# EAGLE board ArduinoTemplateShield (EAGLE 9.3.0)
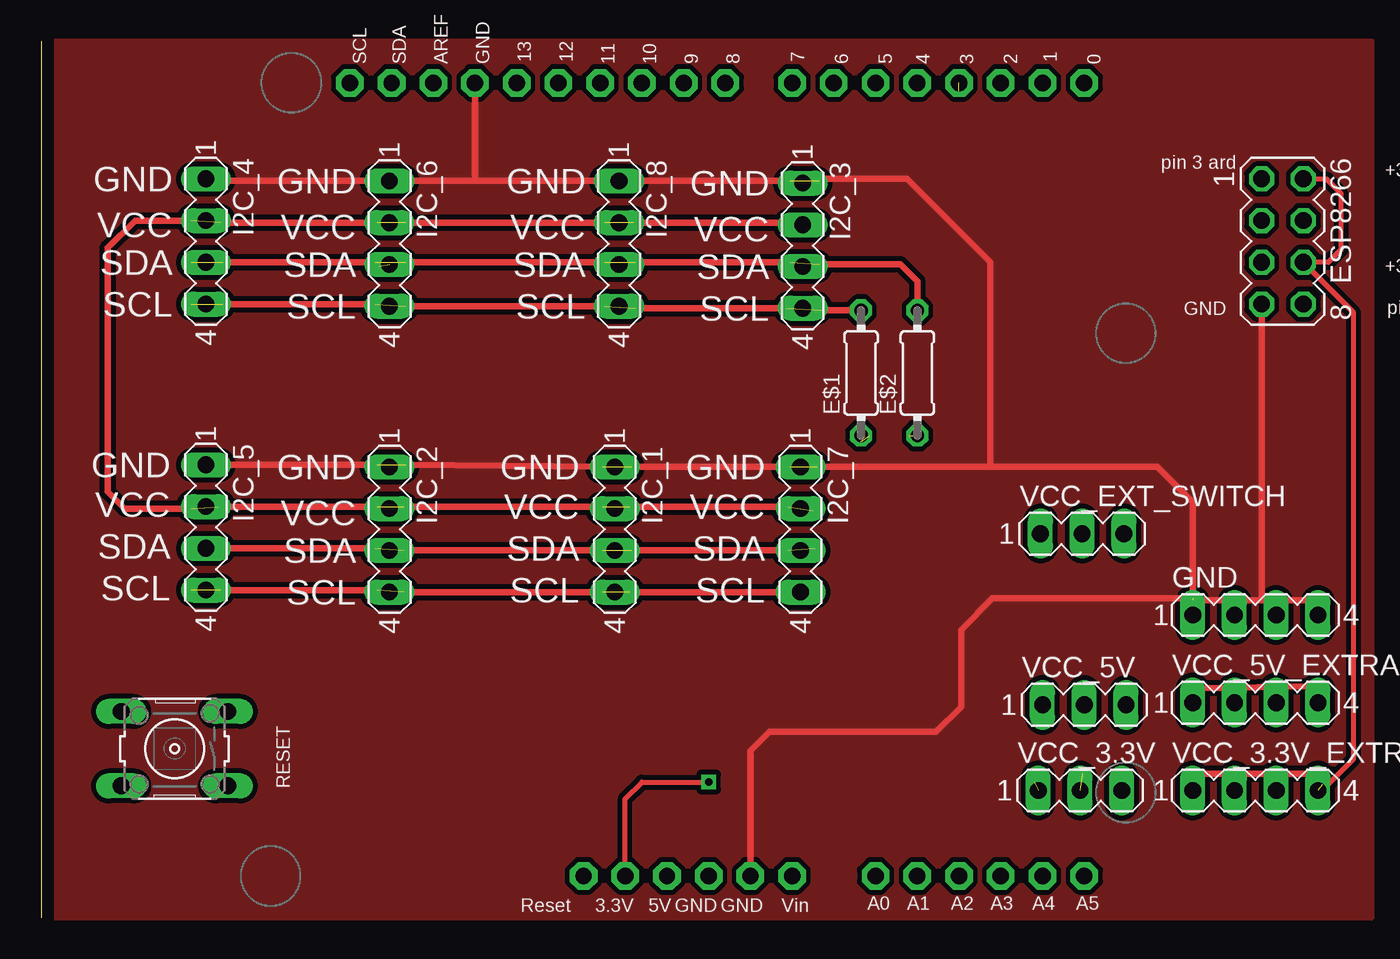
[diagram p0: board, top side]
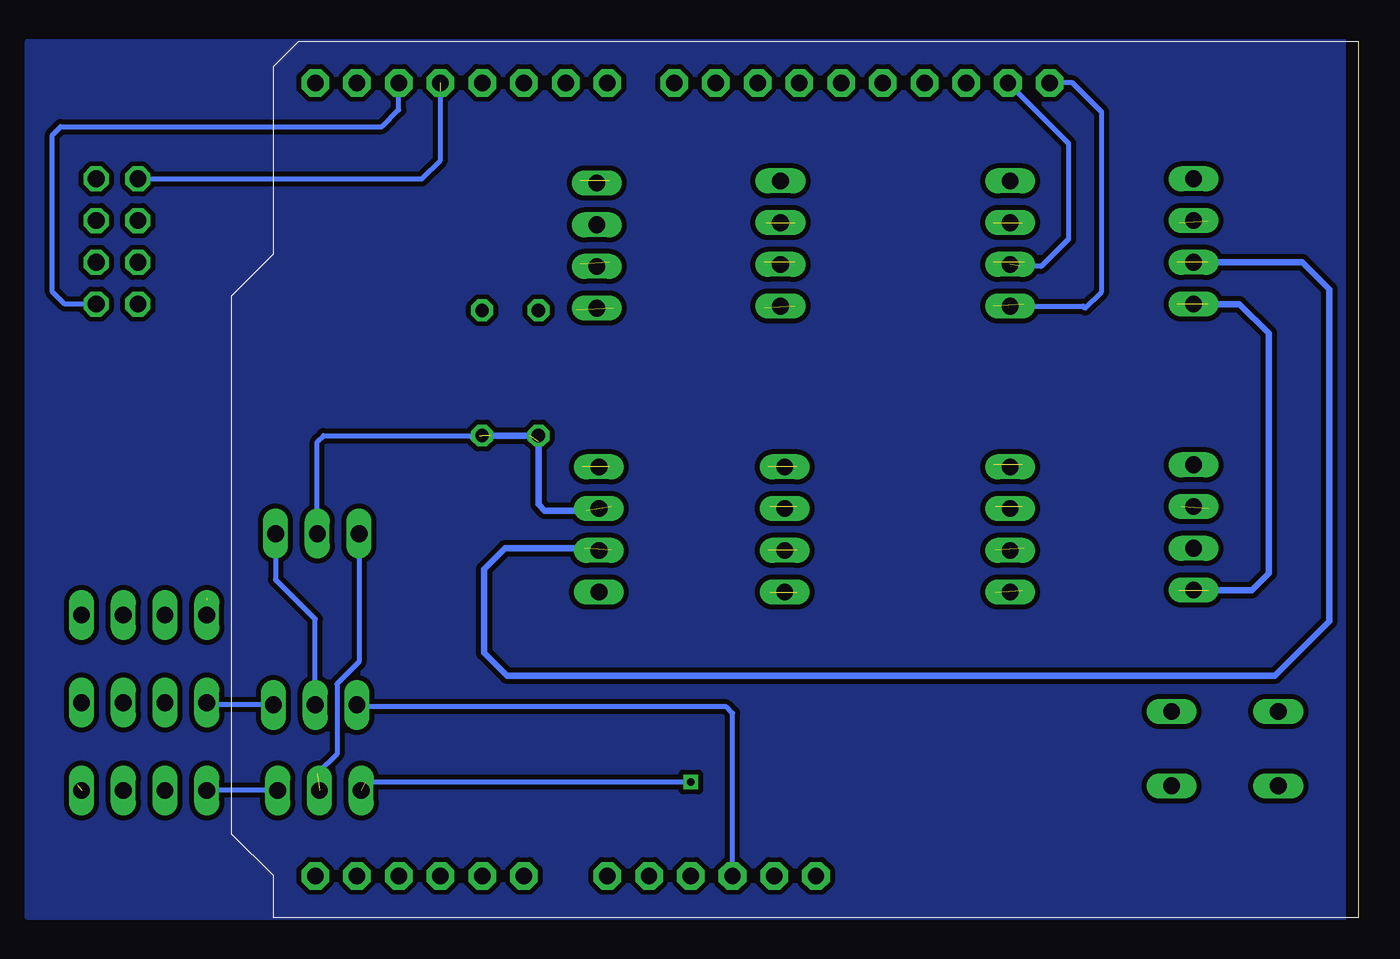
[diagram p1: board, bottom side, seen from below]

Size 0 x 53.34 mm. Coordinates in mm from the lower left corner, seen from the top.
Outline: 0,53.34 0,0
Copper layers (1*16): Top 0.035mm / dielectric 1.5mm / Bottom 0.035mm
Design rules "default *": minimum track width 12mil, minimum drill 19mil, track to track 12mil, track to pad 12mil, pad to pad 12mil, via to via 12mil, smd to smd 8mil, copper to edge 30mil, drill to drill 8mil, minimum pad ring 10mil, minimum via ring 8mil, stop-mask expansion 4mil, vias tented up to drill 0mil, thermal gap 10mil

## Footprints (pad centres in the part's own frame; a part is rotated, then mirrored left to right if it is on the bottom)
0204/7 = drill 0.813 octagon: 1 -3.81,0; 2 3.81,0
MA04-2 = drill 1.016 octagon: 1 -3.81,-1.27; 2 -3.81,1.27; 3 -1.27,-1.27; 4 -1.27,1.27; 5 1.27,-1.27; 6 1.27,1.27; 7 3.81,-1.27; 8 3.81,1.27
MA04-1 = drill 1.016 long: 1 -3.81,0; 2 -1.27,0; 3 1.27,0; 4 3.81,0
B3F-10XX = drill 1.016 long: 1 -3.251,2.261; 2 3.251,2.261; 3 -3.251,-2.261; 4 3.251,-2.261
ARDUINOR3-NOTEXT-NOIOREF = drill 1 pad 1.676 octagon: 3V 35.56,2.54; 5V 38.1,2.54; A0 50.8,2.54; A1 53.34,2.54; A2 55.88,2.54; A3 58.42,2.54; A4 60.96,2.54; A5 63.5,2.54; AREF 23.876,50.8; D0 63.5,50.8; D1 60.96,50.8; D2 58.42,50.8; D3 55.88,50.8; D4 53.34,50.8; D5 50.8,50.8; D6 48.26,50.8; D7 45.72,50.8; D8 41.656,50.8; D9 39.116,50.8; D10 36.576,50.8; D11 34.036,50.8; D12 31.496,50.8; D13 28.956,50.8; GND 26.416,50.8; GND1 43.18,2.54; GND2 40.64,2.54; RESET 33.02,2.54; SCL 18.796,50.8; SDA 21.336,50.8; VIN 45.72,2.54
MA03-1 = drill 1.016 long: 1 -2.54,0; 2 0,0; 3 2.54,0

## Placement (x,y rotation side)
E$1  [0204/7]  49.91,33.15 90 top  (outside the outline)
E$2  [0204/7]  53.34,33.15 90 top  (outside the outline)
ESP8266  [MA04-2]  75.56,41.15 270 top  (outside the outline)
GND  [MA04-1]  73.91,18.41 0 top  (outside the outline)
I2C_1  [MA04-1]  34.92,23.62 270 top  (outside the outline)
I2C_2  [MA04-1]  21.21,23.62 270 top  (outside the outline)
I2C_3  [MA04-1]  46.35,40.89 270 top  (outside the outline)
I2C_4  [MA04-1]  10.03,41.15 270 top  (outside the outline)
I2C_5  [MA04-1]  10.03,23.75 270 top  (outside the outline)
I2C_6  [MA04-1]  21.21,41.02 270 top  (outside the outline)
I2C_7  [MA04-1]  46.23,23.62 270 top  (outside the outline)
I2C_8  [MA04-1]  35.18,41.02 270 top  (outside the outline)
RESET  [B3F-10XX]  8.13,10.29 180 top  (outside the outline)
U1  ARDUINOR3-NOIOREF-NOTEXT  [ARDUINOR3-NOTEXT-NOIOREF]  0,0 0 top  (outside the outline)
VCC_3.3V  [MA03-1]  63.25,7.75 0 top  (outside the outline)
VCC_3.3V_EXTRA  [MA04-1]  73.91,7.75 0 top  (outside the outline)
VCC_5V  [MA03-1]  63.5,12.95 0 top  (outside the outline)
VCC_5V_EXTRA  [MA04-1]  73.91,13.08 0 top  (outside the outline)
VCC_EXT_SWITCH  [MA03-1]  63.37,23.37 0 top  (outside the outline)

## Library data of the parts
E$1 E$2 = eagle-ltspice
ESP8266 GND I2C_1-I2C_8 VCC_3.3V VCC_3.3V_EXTRA VCC_5V VCC_5V_EXTRA VCC_EXT_SWITCH = con-lstb
RESET = switch-omron
U1 = adafruit

## Nets
S$1: VCC_5V.3 VCC_5V_EXTRA.1
S$2: VCC_3.3V.3 VCC_3.3V_EXTRA.1
S$3: ESP8266.2 ESP8266.6 VCC_3.3V_EXTRA.4
S$5: U1.5V VCC_5V.1
S$6: I2C_6.4 U1.SCL
S$7: I2C_6.3 U1.SDA
S$8: ESP8266.1 U1.D3
S$12: VCC_5V.2 VCC_EXT_SWITCH.3
S$13: U1.3V VCC_3.3V.1
S$14: VCC_3.3V.2 VCC_EXT_SWITCH.1
S$15: ESP8266.8 U1.D2
VCC_EXT: E$2.1 VCC_EXT_SWITCH.2
VIN: U1.VIN

## Tracks (layer width: path | path; a pad name or v marks a point on that pad's centre or on a via)
GND  (5 unrouted)
  Top 0.406: 47.37,44.83 47.5,44.96 52.7,44.96 57.78,39.88 57.78,27.43 | 47.24,27.43 57.78,27.43 | 57.78,27.43 67.94,27.43 70.1,25.27 70.1,19.43 57.91,19.43 56.01,17.53 56.01,12.83 54.48,11.3 44.32,11.3 43.18,10.16 43.18,3.3 | 35.94,27.43 45.59,27.43 | 22.23,27.56 34.16,27.43 | 36.2,44.83 45.59,44.83 | 22.23,44.83 26.42,44.83 | 26.42,44.83 34.29,44.83 | 26.42,50.04 26.42,44.83 | 10.92,44.83 13.84,44.83 20.19,44.83 | 70.1,19.3 74.3,19.3 | 74.3,19.3 77.98,19.3 | 74.3,36.7 74.3,19.3 | 11.05,27.56 20.45,27.56
  pour Bottom: 0,53.34 0,0 81.03,0 81.03,53.34
  pour Top: 0,53.34 0,0 81.03,0 81.03,53.34
S$1
  Bottom 0.305: VCC_5V.3 69.98,12.95 VCC_5V_EXTRA.1
S$2
  Bottom 0.305: VCC_3.3V.3 VCC_3.3V_EXTRA.1
S$3  (1 unrouted)
  Top 0.305: ESP8266.6 76.96,39.75 | 76.96,39.75 79.88,36.83 79.88,9.65 78.33,8.1 77.98,8.1 | ESP8266.2 78.23,44.96 79.12,44.07 79.12,40.64 78.36,39.88 77.09,39.88 76.96,39.75
S$5
  Bottom 0.305: U1.5V 38.1,12.45 38.48,12.83 60.83,12.83 VCC_5V.1
S$6
  Bottom 0.305: I2C_6.4 16.76,37.21 16.64,37.08 15.62,38.1 15.62,49.02 17.4,50.8 U1.SCL
S$7  (1 unrouted)
  Bottom 0.305: U1.SDA 17.65,47.12 17.65,41.27 19.3,39.62 20.57,39.62
S$8  (1 unrouted)
  Bottom 0.305: ESP8266.1 57.02,44.96 55.88,46.1 55.88,50.29
S$12
  Bottom 0.305: VCC_EXT_SWITCH.3 65.91,20.57 63.5,18.16 VCC_5V.2
S$13  (via drill 0.48)  (1 unrouted)
  Top 0.305: U1.3V 35.56,7.24 36.58,8.26 v40.64,8.26
  Bottom 0.305: v40.64,8.26 60.45,8.26 60.71,8.51
S$14  (1 unrouted)
  Bottom 0.305: VCC_EXT_SWITCH.1 60.83,15.57 62.18,14.22 62.18,9.96 63.37,8.76
S$15
  Bottom 0.305: ESP8266.8 78.74,37.34 79.5,38.1 79.5,47.62 78.99,48.13 59.44,48.13 58.42,49.15 U1.D2
SCL  (7 unrouted)
  Top 0.406: 10.92,19.94 20.45,19.94 | 11.05,37.34 20.32,37.34 | 22.23,37.21 34.29,37.21 | 36.2,37.08 45.34,37.08 | 47.62,36.96 49.28,36.96 | 22.1,19.81 34.16,19.81 | 35.81,19.81 45.34,19.81
  Bottom 0.406: 9.14,19.94 6.48,19.94 5.46,20.95 5.46,35.56 7.24,37.34 9.14,37.34
SDA  (7 unrouted)
  Top 0.406: 11.05,39.88 20.32,39.88 | 36.2,39.88 45.59,39.88 | 22.23,39.88 34.29,39.88 | 47.37,39.75 52.32,39.75 53.34,38.73 53.34,37.59 | 35.94,22.35 45.47,22.35 | 22.1,22.35 34.16,22.35 | 10.92,22.48 20.32,22.48
  Bottom 0.406: 47.12,22.48 51.94,22.48 53.21,21.21 53.21,16.13 51.82,14.73 5.08,14.73 1.78,18.03 1.78,38.23 3.43,39.88 9.14,39.88
VCC_3.3
  Top 0.406: 70.23,8.76 77.98,8.76
VCC_5
  Top 0.406: 70.1,13.97 77.85,14.1
VCC_EXT  (10 unrouted)
  Top 0.406: 35.81,25.02 45.47,25.02 | 22.1,25.02 34.16,25.02 | 10.79,25.02 20.45,25.02 | 9.14,24.89 5.08,24.89 4.06,25.91 4.06,40.77 5.71,42.42 9.14,42.42 | 10.92,42.29 20.45,42.29 | 22.23,42.29 34.29,42.29 | 36.07,42.29 45.59,42.29
  Bottom 0.305: VCC_EXT_SWITCH.2 63.37,28.96 62.99,29.34 53.85,29.34 | 53.49,29.34 53.85,29.34 | 53.85,29.34 53.98,29.21
  Bottom 0.406: 50.42,29.34 52.83,29.34 | 49.91,28.96 49.91,25.65 49.91,25.15 49.53,24.77 46.99,24.77

## Text on the board
tPlace: SCL | SDA | AREF | GND | 13 | 12 | 11 | 10 | 9 | 8 | 7 | 6 | 5 | 4 | 3 | 2 | 1 | 0 | GND | GND | GND | pin 3 ard | GND | +3v | VCC | VCC | VCC | VCC | SDA | SDA | SDA | SDA | +3v | SCL | SCL | SCL | SCL | GND | pin 2 ard | GND | GND | GND | GND | VCC | VCC | VCC | VCC | SDA | SDA | SDA | SDA | SCL | SCL | SCL | SCL | Reset | 3.3V | 5V | GND | GND | Vin | A0 | A1 | A2 | A3 | A4 | A5